# Altium PCB 00.Main.PcbDoc (part 1 of 5)
Units mm, origin at the board's own origin, x right, y up, seen from the top; angles counter-clockwise.
Board outline 300 x 165 mm, 2 copper layers (Top Layer, Bottom Layer); 76 components, 103 nets, 576 pads, 97 vias.
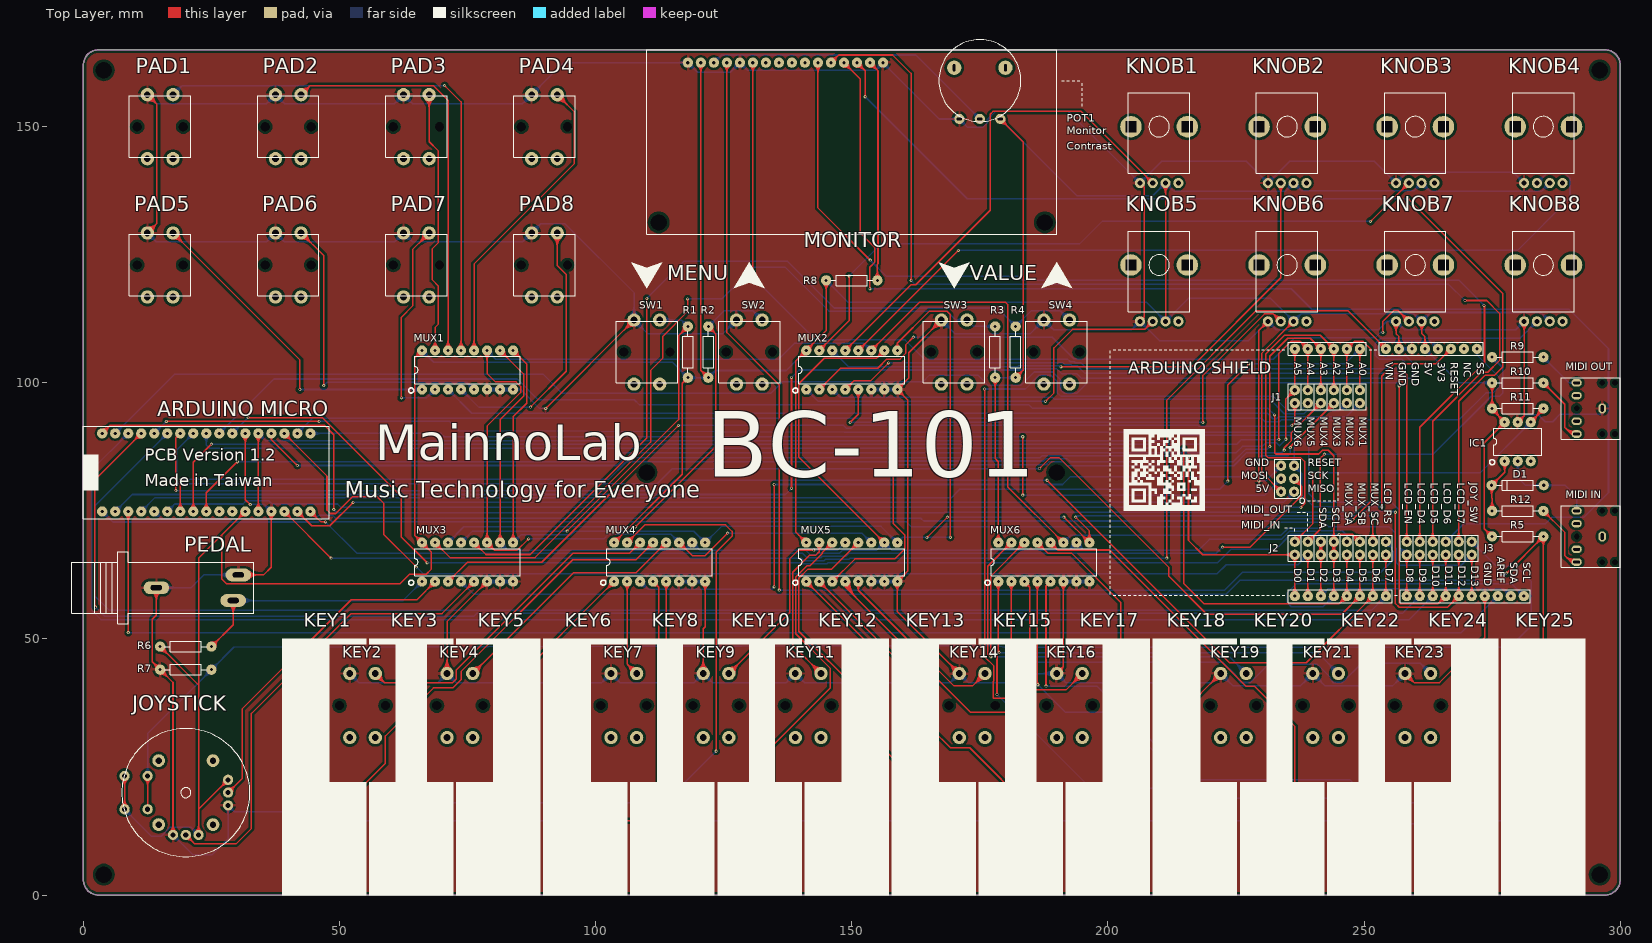
[diagram p0: Top Layer view]
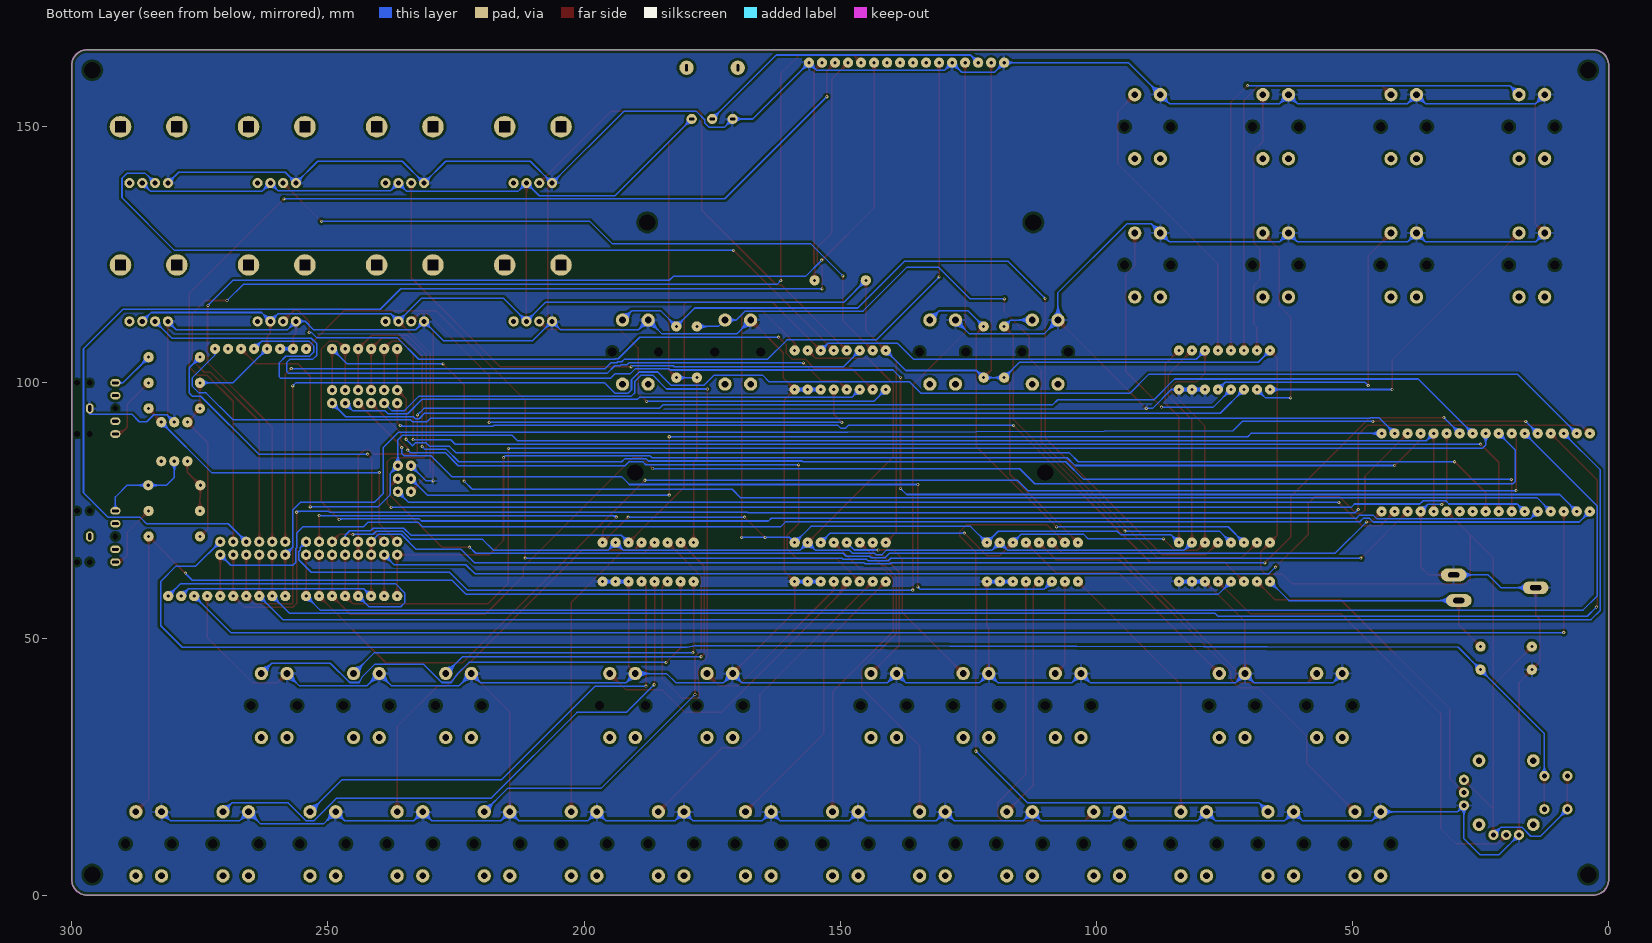
[diagram p1: Bottom Layer view, seen from below]

## Layer stack, top to bottom
Top Layer: signal copper 0.0356
Dielectric: dielectric 0.32, FR-4, Dk 4.8
Bottom Layer: signal copper 0.0356

## Board outline
0,3 0,162 cw(c3,162) 3,165 297,165 cw(c297,162) 300,162 300,3 cw(c297,3) 297,0 3,0 cw(c3,3)

## Design rules (kind name [scope] priority, off if disabled: settings)
Clearance [All] p1: gap=0.3
ComponentClearance [All] p1 off: gap=0.254 collisioncheckmode=3 verticalgap=0.254 showdistances=FALSE
HoleSize [All] p1: absolutevalues=TRUE maxlimit=30 minlimit=0.3 maxpercent=80.000 minpercent=20.000
PolygonConnect [All] p1: connectstyle=Relief reliefconductorwidth=0.5 reliefentries=4 polygonreliefangle="90 Angle" airgapwidth=0.5
RoutingVias [All] p1: holewidth=0.3 width=0.6 viastyle="Through Hole" minholewidth=0.3 minwidth=0.6 maxholewidth=0.3 maxwidth=0.6
SilkToSilkClearance [All] p1: silktosilkclearance=0
SilkToSolderMaskClearance [IsPad] p1: minsilkscreentomaskgap=0 clearancetoexposedcopper=TRUE
SolderMaskExpansion [All] p1: expansion=0.102
Width [All] p1: maxlimit=0.3 minlimit=0.3 preferedwidth=0.3 minimp=50.000000 maximp=50.000000 favimp=50.000000
24 further rules are at their usual default settings.

## Classes and differential pairs
component class "02.Pads and Knobs": KNOB1 KNOB2 KNOB3 KNOB4 KNOB5 KNOB6 KNOB7 KNOB8 "KNOB 1" MUX1 MUX2 PAD1 PAD2 PAD3 PAD4 PAD5 PAD6 PAD7 PAD8
component class 03.Keys: KEY1 KEY2 KEY3 KEY4 KEY5 KEY6 KEY7 KEY8 KEY9 KEY10 KEY11 KEY12 KEY13 KEY14 KEY15 KEY16 KEY17 KEY18 KEY19 KEY20 KEY21 KEY22 KEY23 KEY24 MUX4 MUX5 MUX6
component class "01.Arduino and Interfaces": "ARDUINO MICRO" "ARDUINO SHIELD" Contrast D1 IC1 J1 J2 J3 JOYSTICK KEY25 "MIDI IN" "MIDI OUT" MONITOR MUX3 PEDAL R1 R2 R3 R4 R5 R6 R7 R8 R9 R10 R11 R12 SW1 SW2 SW3 SW4

## Components (designator, comment, footprint, x,y, rotation, side; value= is the part's Value field where it differs from the comment)
"ARDUINO MICRO" "Arduino Micro" "ARDUINO MICRO" 24,82.5 r0 top locked
"ARDUINO SHIELD" "Arduino Shield" "ARDUINO SHIELD" 257.5,82.5 r180 top locked
D1 "1N4148" DIODE 280,80 r180 top
IC1 "PC900" DIP-6 280,88.5 r90 top (schematic designator IC7)
J1 "Connector 2X6" A2541WV0-2X6P 242.838,97.3 r0 top locked
J2 "Connector 2X8" A2541WV0-2X8P 245.378,67.7 r0 top locked (schematic designator J9)
J3 "Connector 2X6" A2541WV0-2X6P 264.682,67.7 r0 top locked (schematic designator J8)
JOYSTICK "FJM10K-S1B10K" "JOYSTICK FJM10K-S1B10K" 20,20 r270 top locked
KEY1 "HTS-2201T" "ALPS-SKHC-12MM - NO SILK" 47,10 r90 top locked
KEY2 "HTS-2201T" "ALPS-SKHC-12MM - NO SILK" 54.5,37 r90 top locked
KEY3 "HTS-2201T" "ALPS-SKHC-12MM - NO SILK" 64,10 r90 top locked
KEY4 "HTS-2201T" "ALPS-SKHC-12MM - NO SILK" 73.5,37 r90 top locked
KEY5 "HTS-2201T" "ALPS-SKHC-12MM - NO SILK" 81,10 r90 top locked
KEY6 "HTS-2201T" "ALPS-SKHC-12MM - NO SILK" 98,10 r90 top locked
KEY7 "HTS-2201T" "ALPS-SKHC-12MM - NO SILK" 105.5,37 r90 top locked
KEY8 "HTS-2201T" "ALPS-SKHC-12MM - NO SILK" 115,10 r90 top locked
KEY9 "HTS-2201T" "ALPS-SKHC-12MM - NO SILK" 123.5,37 r90 top locked
KEY10 "HTS-2201T" "ALPS-SKHC-12MM - NO SILK" 132,10 r90 top locked
KEY11 "HTS-2201T" "ALPS-SKHC-12MM - NO SILK" 141.5,37 r90 top locked
KEY12 "HTS-2201T" "ALPS-SKHC-12MM - NO SILK" 149,10 r90 top locked
KEY13 "HTS-2201T" "ALPS-SKHC-12MM - NO SILK" 166,10 r90 top locked
KEY14 "HTS-2201T" "ALPS-SKHC-12MM - NO SILK" 173.5,37 r90 top locked
KEY15 "HTS-2201T" "ALPS-SKHC-12MM - NO SILK" 183,10 r90 top locked
KEY16 "HTS-2201T" "ALPS-SKHC-12MM - NO SILK" 192.5,37 r90 top locked
KEY17 "HTS-2201T" "ALPS-SKHC-12MM - NO SILK" 200,10 r90 top locked
KEY18 "HTS-2201T" "ALPS-SKHC-12MM - NO SILK" 217,10 r90 top locked
KEY19 "HTS-2201T" "ALPS-SKHC-12MM - NO SILK" 224.5,37 r90 top locked
KEY20 "HTS-2201T" "ALPS-SKHC-12MM - NO SILK" 234,10 r90 top locked
KEY21 "HTS-2201T" "ALPS-SKHC-12MM - NO SILK" 242.5,37 r90 top locked
KEY22 "HTS-2201T" "ALPS-SKHC-12MM - NO SILK" 251,10 r90 top locked
KEY23 "HTS-2201T" "ALPS-SKHC-12MM - NO SILK" 260.5,37 r90 top locked
KEY24 "HTS-2201T" "ALPS-SKHC-12MM - NO SILK" 268,10 r90 top locked
KEY25 "HTS-2201T" "ALPS-SKHC-12MM - NO SILK" 285,10 r90 top locked
KNOB1 "VR Mono" RK11K113 210,150 r0 top
KNOB2 "VR Mono" RK11K113 235,150 r0 top
KNOB3 "VR Mono" RK11K113 260,150 r0 top
KNOB4 "VR Mono" RK11K113 285,150 r0 top
KNOB5 "VR Mono" RK11K113 210,123 r0 top
KNOB6 "VR Mono" RK11K113 235,123 r0 top
KNOB7 "VR Mono" RK11K113 260,123 r0 top
KNOB8 "VR Mono" RK11K113 285,123 r0 top
"MIDI IN" "Jack 3.5mm PhoneJack" "PHONEJACK EJ05-06-PF" 296.5,70 r180 top (schematic designator JK2)
"MIDI OUT" "Jack 3.5mm PhoneJack" "PHONEJACK EJ05-06-PF" 296.5,95 r180 top (schematic designator JK1)
MONITOR "Module LCM1602" LCM1602 150,147 r0 top locked
MUX1 "HD74HC4051P" DIP-16 75,102.5 r90 top
MUX2 "HD74HC4051P" DIP-16 150,102.5 r90 top
MUX3 "HD74HC4051P" DIP-16 75,65 r90 top
MUX4 "HD74HC4051P" DIP-16 112.5,65 r90 top
MUX5 "HD74HC4051P" DIP-16 150,65 r90 top
MUX6 "HD74HC4051P" DIP-16 187.5,65 r90 top
PAD1 "HTS-2201T" ALPS-SKHC-12MM 15,150 r90 top
PAD2 "HTS-2201T" ALPS-SKHC-12MM 40,150 r90 top
PAD3 "HTS-2201T" ALPS-SKHC-12MM 65,150 r90 top
PAD4 "HTS-2201T" ALPS-SKHC-12MM 90,150 r90 top
PAD5 "HTS-2201T" ALPS-SKHC-12MM 15,123 r90 top
PAD6 "HTS-2201T" ALPS-SKHC-12MM 40,123 r90 top
PAD7 "HTS-2201T" ALPS-SKHC-12MM 65,123 r90 top
PAD8 "HTS-2201T" ALPS-SKHC-12MM 90,123 r90 top
PEDAL "HTJ-064-10I" HTJ-064-10I 6.75,60 r90 top locked (schematic designator JK2)
POT1 "B10K" RV100F-30 175,159 r0 top (schematic designator VR1)
R1 "10K" "RES 1/4W" 118,106 r90 top
R2 "10K" "RES 1/4W" 122,106 r90 top
R3 "10K" "RES 1/4W" 178,106 r90 top
R4 "10K" "RES 1/4W" 182,106 r90 top
R5 "10K" "RES 1/4W" 280,70 r0 top
R6 "10K" "RES 1/4W" 20,48.5 r0 top
R7 "10K" "RES 1/4W" 20,44 r180 top
R8 "220R" "RES 1/4W" 150,120 r0 top
R9 "220R" "RES 1/4W" 280,105 r180 top
R10 "220R" "RES 1/4W" 280,100 r180 top
R11 "220R" "RES 1/4W" 280,95 r180 top
R12 "220R" "RES 1/4W" 280,75 r180 top
SW1 "HTS-2201T" ALPS-SKHC-12MM 110,106 r90 top
SW2 "HTS-2201T" ALPS-SKHC-12MM 130,106 r90 top
SW3 "HTS-2201T" ALPS-SKHC-12MM 170,106 r90 top
SW4 "HTS-2201T" ALPS-SKHC-12MM 190,106 r90 top

## Footprints (in the part's own frame and the unit in brackets; to place one, negate y for a bottom-side part, rotate by r counter-clockwise, add the part's x,y. Pads: shape width x height; smd on the part's side, far side on the other; paste and mask are expansions set on the pad)
A2541WV0-2X6P [mm]
  round 2 hole 0.84: 1(-6.35,-1.27) 2(-6.35,1.27) 3(-3.81,-1.27) 4(-3.81,1.27) 5(-1.27,-1.27) 6(-1.27,1.27) 7(1.27,-1.27) 8(1.27,1.27) 9(3.81,-1.27) 10(3.81,1.27) 11(6.35,-1.27) 12(6.35,1.27)
  silkscreen extent -7.62,-2.54 7.62,2.54
A2541WV0-2X8P [mm]
  round 2 hole 0.84: 1(-8.89,-1.27) 2(-8.89,1.27) 3(-6.35,-1.27) 4(-6.35,1.27) 5(-3.81,-1.27) 6(-3.81,1.27) 7(-1.27,-1.27) 8(-1.27,1.27) 9(1.27,-1.27) 10(1.27,1.27) 11(3.81,-1.27) 12(3.81,1.27) 13(6.35,-1.27) 14(6.35,1.27) 15(8.89,-1.27) 16(8.89,1.27)
  silkscreen extent -10.16,-2.54 10.16,2.54
ALPS-SKHC-12MM [mm]
  round 2.6 hole 1.3: 1(6.25,2.5) 2(6.25,-2.5) ""(-6.25,-2.5) ""(-6.25,2.5)
  round 0 hole 1.8: ""(0,4.5) ""(0,-4.5)
  silkscreen extent -6,-6 6,6
"ALPS-SKHC-12MM - NO SILK" [mm]
  round 2.6 hole 1.3: 1(6.25,2.5) 2(6.25,-2.5) ""(-6.25,-2.5) ""(-6.25,2.5)
  round 0 hole 1.8: ""(0,4.5) ""(0,-4.5)
"ARDUINO MICRO" [mm]
  round 2 hole 0.65: 1(-20.32,-7.62) 2(-17.78,-7.62) 3(-15.24,-7.62) 4(-12.7,-7.62) 5(-10.16,-7.62) 6(-7.62,-7.62) 7(-5.08,-7.62) 8(-2.54,-7.62) 9(0,-7.62) 10(2.54,-7.62) 11(5.08,-7.62) 12(7.62,-7.62) 13(10.16,-7.62) 14(12.7,-7.62) 15(15.24,-7.62) 16(17.78,-7.62) 17(20.32,-7.62) 18(20.32,7.62) 19(17.78,7.62) 20(15.24,7.62) 21(12.7,7.62) 22(10.16,7.62) 23(7.62,7.62) 24(5.08,7.62) 25(2.54,7.62) 26(0,7.62) 27(-2.54,7.62) 28(-5.08,7.62) 29(-7.62,7.62) 30(-10.16,7.62) 31(-12.7,7.62) 32(-15.24,7.62) 33(-17.78,7.62) 34(-20.32,7.62)
  silkscreen extent -24,-9 24,9
"ARDUINO SHIELD" [mm]
  round 2 hole 0.65: 1(-14.548,-24.13) 2(-12.008,-24.13) 3(-9.468,-24.13) 4(-6.928,-24.13) 5(-4.388,-24.13) 6(-1.848,-24.13) 7(0.692,-24.13) 8(3.232,-24.13) 9(8.312,-24.13) 10(10.852,-24.13) 11(13.392,-24.13) 12(15.932,-24.13) 13(18.472,-24.13) 14(21.012,-24.13) 15(21.012,24.13) 16(18.472,24.13) 17(15.932,24.13) 18(13.392,24.13) 19(10.852,24.13) 20(8.312,24.13) 21(5.772,24.13) 22(3.232,24.13) 23(-0.832,24.13) 24(-3.372,24.13) 25(-5.912,24.13) 26(-8.452,24.13) 27(-10.992,24.13) 28(-13.532,24.13) 29(-16.072,24.13) 30(-18.612,24.13) 31(-21.152,24.13) 32(-23.692,24.13)
  round 2 hole 0.84: "1\""(21.152,3.76) "2\""(23.692,3.76) "3\""(21.152,1.22) "4\""(23.692,1.22) "5\""(21.152,-1.32) "6\""(23.692,-1.32)
  silkscreen extent -24.96,-25.4 24.96,25.4
DIODE [mm]
  round 2 hole 0.6: 1(-5.08,0) 2(5.08,0)
  silkscreen extent -4.06,-1.02 4.06,1.02
DIP-6 [mm]
  round 2 hole 0.6: 1(-3.81,2.54) 2(-3.81,0) 3(-3.81,-2.54) 4(3.81,-2.54) 5(3.81,0) 6(3.81,2.54)
  silkscreen extent -4.5,-4.7 2.65,5.5
DIP-16 [mm] "DIP; 16 Leads; Row Spacing 7.62 mm; Pitch 2.54 mm"
  round 2 hole 0.6: 1(-3.81,8.89) 2(-3.81,6.35) 3(-3.81,3.81) 4(-3.81,1.27) 5(-3.81,-1.27) 6(-3.81,-3.81) 7(-3.81,-6.35) 8(-3.81,-8.89) 9(3.81,-8.89) 10(3.81,-6.35) 11(3.81,-3.81) 12(3.81,-1.27) 13(3.81,1.27) 14(3.81,3.81) 15(3.81,6.35) 16(3.81,8.89)
  silkscreen extent -4.5,-10.3 2.65,11.5
HTJ-064-10I [mm]
  oval 2.5x5 hole 1 slot 2.2 at 90 deg: 1(0,-7.5) 2(-2.5,-22.5) 4(2.5,-23.5)
  silkscreen extent -7,-26.5 7,9
"JOYSTICK FJM10K-S1B10K" [mm]
  round 2.5 hole 1.25: 0(-6.25,5.3) 0(-6.25,-5.3) 0(6.25,5.3) 0(6.25,-5.3)
  round 2 hole 1: 1X(8.25,-2.5) 1Y(2.5,8.25) 2X(8.25,0) 2Y(0,8.25) 3X(8.25,2.5) 3Y(-2.5,8.25) 5(-3.25,-7.45) 5(3.25,-7.45) 6(-3.25,-11.95) 6(3.25,-11.95)
  silkscreen extent -12.5,-12.5 12.5,12.5
LCM1602 [mm]
  round 2 hole 0.65: 1(-32,15.5) 2(-29.46,15.5) 3(-26.92,15.5) 4(-24.38,15.5) 5(-21.84,15.5) 6(-19.3,15.5) 7(-16.76,15.5) 8(-14.22,15.5) 9(-11.68,15.5) 10(-9.14,15.5) 11(-6.6,15.5) 12(-4.06,15.5) 13(-1.52,15.5) 14(1.02,15.5) 15(3.56,15.5) 16(6.1,15.5)
  round 0 hole 3.2: G(-37.7,-15.7) G(37.7,-15.7)
  silkscreen extent -40,-18 40,18
"PHONEJACK EJ05-06-PF" [mm]
  round 0 hole 1.1: 0(-2.5,5) 0(-2.5,-5) 0(0,5) 0(0,-5) 0(5,0)
  oval 1.5x2 hole 0.5 slot 1.3 at 90 deg: 1(0,0)
  oval 2x1.5 hole 0.5 slot 1.3 at 0 deg: 2(5,5) 3(5,2.5) 4(5,-2.5) 5(5,-5)
  silkscreen extent -3.5,-6 8,6
"RES 1/4W" [mm]
  round 2 hole 0.6: 1(-5,0) 2(5,0)
  silkscreen extent -4.06,-1.02 4.06,1.02
RK11K113 [mm]
  round 4.2 hole 2.1 square: 0(-5.5,0) 0(5.5,0)
  round 2 hole 1: 0(3.75,-11) 1(-3.75,-11) 2(-1.25,-11) 3(1.25,-11)
  silkscreen extent -6,-9.1 6,6.6
RV100F-30 [mm]
  round 2.8 hole 0.5 slot 1.4 at 90 deg: 0(-5,2.5) 0(5,2.5)
  round 2 hole 0.5 slot 1 at 0 deg: 1(-4,-7.5) 2(0,-7.5) 3(4,-7.5)
  silkscreen extent -8,-8 8,8

## Part data
"ARDUINO MICRO": "Arduino Micro Board"
D1: library part "Diode 1N4148"
IC1: library part "Optoisolator PC900", "Sharp PC900 Optoisolator"
JOYSTICK: library part "Joystick with Sw"
KEY1 KEY2 KEY3 KEY4 KEY5 KEY6 KEY7 KEY8 KEY9 KEY10 KEY11 KEY12 KEY13 KEY14 KEY15 KEY16 KEY17 KEY18 KEY19 KEY20 KEY21 KEY22 KEY23 KEY24 KEY25 PAD1 PAD2 PAD3 PAD4 PAD5 PAD6 PAD7 PAD8 SW1 SW2 SW3 SW4: library part "Tact Switch HTS-2201T"
MUX1 MUX2 MUX3 MUX4 MUX5 MUX6: library part TC74HC4051AF
POT1: library part "VR Mono"
R1 R2 R3 R4 R5 R6 R7 R8 R9 R10 R11 R12: library part Resistor

## Free pads (board coordinates)
  round 0 hole 3.2: 0(4,161) 1(4,4) 2(296,161) 3(296,4) 4(190,82.5) 5(110,82.5)

## Via types
v1: diameter 0.6, hole 0.3, Top Layer to Bottom Layer, 97 vias

## Nets (pads, with @x,y where several pads share a name; then routed paths per layer and width w, separated by ;. In a path a pad name is that pad's centre, name@x,y a point inside that pad or via, vN(x,y) a via of type N, cw(c..) or ccw(c..) an arc to the next point about the centre after c; other vN are vias at no path point)
3V3: "ARDUINO MICRO.2" "ARDUINO SHIELD.4" | length 315.4
  Top Layer w0.3: v1@138.132,79.492 ccw(c137.876,79.749) 138.238,79.749 ccw(c138.6,79.749) v1@138.344,79.492 ; v1@138.132,100.947 cw(c137.876,100.69) 138.238,100.69 cw(c138.6,100.69) v1@138.344,100.947 ; v1(138.238,79.386) v1(138.238,101.053)
  Bottom Layer w0.3: 6.22,74.88 9.533,78.193 137.044,78.193 v1(138.238,79.386) ; 6.22,75.43 ccw(c6.22,76.758) 7.159,75.819 ccw(c8.098,74.88) 6.77,74.88 ; 6.22,75.73 ccw(c6.22,77.782) 7.671,76.331 ccw(c9.122,74.88) 7.07,74.88 ; v1@138.088,79.386 cw(c137.726,79.386) 137.982,79.13 cw(c138.238,78.874) v1@138.238,79.236 ; v1(138.238,101.053) 139.686,102.5 183.176,102.5 183.386,102.71 190.06,102.71 191.045,101.725 194.03,101.725 194.854,100.9 259.247,100.9 259.552,101.205 259.552,103.876 258.261,105.167 253.63,105.167 252.817,105.98 252.817,107.276 253.63,108.088 262.97,108.088 264.428,106.63 ; v1@138.238,101.203 ccw(c138.238,101.565) 138.494,101.309 ccw(c138.75,101.053) v1@138.388,101.053 ; 263.578,106.63 ccw(c261.526,106.63) 262.977,108.081 ccw(c264.428,109.532) 264.428,107.48 ; 263.878,106.63 ccw(c262.55,106.63) 263.489,107.569 ccw(c264.428,108.508) 264.428,107.18
5V: "ARDUINO MICRO.12" "ARDUINO SHIELD.2\"" "ARDUINO SHIELD.5" IC1.6 JOYSTICK.3X JOYSTICK.3Y JOYSTICK.6 KNOB1.3 KNOB2.3 KNOB3.3 KNOB4.3 KNOB5.3 KNOB6.3 KNOB7.3 KNOB8.3 MONITOR.2 MUX1.16 MUX2.16 MUX3.16 MUX4.16 MUX5.16 MUX6.16 POT1.3 R1.1 R2.1 R3.1 R4.1 R5.1 R6.1 R8.1 R10.2 R11.2 | length 1227.7
  Top Layer w0.3: JOYSTICK.6@7.449,17.351 ccw(c5.998,18.802) 8.05,18.802 ccw(c10.102,18.802) JOYSTICK.6@8.651,17.351 ; JOYSTICK.6@7.449,22.649 cw(c5.998,21.198) 8.05,21.198 cw(c10.102,21.198) JOYSTICK.6@8.651,22.649 ; JOYSTICK.6@7.661,17.139 ccw(c6.722,18.078) 8.05,18.078 ccw(c9.378,18.078) JOYSTICK.6@8.439,17.139 ; JOYSTICK.6@7.661,22.861 cw(c6.722,21.922) 8.05,21.922 cw(c9.378,21.922) JOYSTICK.6@8.439,22.861 ; JOYSTICK.6@8.05,16.75 JOYSTICK.6@8.05,23.25 ; R6.1@15,47.65 cw(c15,45.598) 16.451,47.049 cw(c17.902,48.5) R6.1@15.85,48.5 ; R6.1@15,47.95 cw(c15,46.622) 15.939,47.561 cw(c16.878,48.5) R6.1@15.55,48.5 ; R6.1@15,48.5 22.5,41 ; JOYSTICK.3X@21.899,12.351 ccw(c20.448,13.802) 22.5,13.802 ccw(c24.552,13.802) JOYSTICK.3X@23.101,12.351 ; JOYSTICK.3X@22.111,12.139 ccw(c21.172,13.078) 22.5,13.078 ccw(c23.828,13.078) JOYSTICK.3X@22.889,12.139 ; JOYSTICK.3X@22.5,11.75 22.5,16.75 ; JOYSTICK.3Y@27.4,22.5 cw(c25.348,22.5) 26.799,21.049 cw(c28.25,19.598) JOYSTICK.3Y@28.25,21.65 ; JOYSTICK.3Y@27.7,22.5 cw(c26.372,22.5) 27.311,21.561 cw(c28.25,20.622) JOYSTICK.3Y@28.25,21.95 ; JOYSTICK.3Y@28.25,22.5 22.5,16.75 ; 30.77,74.88 cw(c28.718,74.88) 30.169,73.429 cw(c31.62,71.978) 31.62,74.03 ; 31.07,74.88 cw(c29.742,74.88) 30.681,73.941 cw(c31.62,73.002) 31.62,74.33 ; 31.62,74.88 27.037,70.297 ; MUX3.16@65.26,68.81 ccw(c63.208,68.81) 64.659,70.261 ccw(c66.11,71.712) MUX3.16@66.11,69.66 ; MUX1.16@65.26,106.31 cw(c63.208,106.31) 64.659,104.859 cw(c66.11,103.408) MUX1.16@66.11,105.46 ; MUX3.16@65.56,68.81 ccw(c64.232,68.81) 65.171,69.749 ccw(c66.11,70.688) MUX3.16@66.11,69.36 ; MUX1.16@65.56,106.31 cw(c64.232,106.31) 65.171,105.371 cw(c66.11,104.432) MUX1.16@66.11,105.76 ; MUX3.16@66.11,67.96 cw(c66.11,65.908) 67.561,67.359 cw(c69.012,68.81) MUX3.16@66.96,68.81 ; MUX3.16@66.11,68.26 cw(c66.11,66.932) 67.049,67.871 cw(c67.988,68.81) MUX3.16@66.66,68.81 ; MUX1.16@66.11,106.31 64.654,104.854 64.654,70.266 MUX3.16@66.11,68.81 67.88,67.04 67.88,63.58 66.94,62.64 63.663,62.64 61.817,60.794 27.951,60.794 27.037,61.708 27.037,70.297 ; MUX4.16@103.61,68.81 116.927,82.127 116.927,99.927 ; MUX4.16@103.61,69.36 ccw(c103.61,70.688) 104.549,69.749 ccw(c105.488,68.81) MUX4.16@104.16,68.81 ; MUX4.16@103.61,69.66 ccw(c103.61,71.712) 105.061,70.261 ccw(c106.512,68.81) MUX4.16@104.46,68.81 ; R1.1@117.174,100.801 cw(c116.27,100.584) 116.927,99.927 ; R1.1@117.801,100.174 ccw(c117.584,99.27) 116.927,99.927 ; R1.1@118,101 116.927,99.927 ; MONITOR.2@119.939,161.899 cw(c118.488,160.448) 120.54,160.448 cw(c122.592,160.448) MONITOR.2@121.141,161.899 ; MONITOR.2@120.151,162.111 cw(c119.212,161.172) 120.54,161.172 cw(c121.868,161.172) MONITOR.2@120.929,162.111 ; MONITOR.2@120.54,162.5 120.54,102.46 R2.1@122,101 ; R2.1@121.15,101 ccw(c119.098,101) 120.549,102.451 ccw(c122,103.902) R2.1@122,101.85 ; R2.1@121.45,101 ccw(c120.122,101) 121.061,101.939 ccw(c122,102.878) R2.1@122,101.55 ; MUX5.16@140.26,68.81 ccw(c138.208,68.81) 139.659,70.261 ccw(c141.11,71.712) MUX5.16@141.11,69.66 ; MUX2.16@140.26,106.31 cw(c138.208,106.31) 139.659,104.859 cw(c141.11,103.408) MUX2.16@141.11,105.46 ; MUX5.16@140.56,68.81 ccw(c139.232,68.81) 140.171,69.749 ccw(c141.11,70.688) MUX5.16@141.11,69.36 ; MUX2.16@140.56,106.31 cw(c139.232,106.31) 140.171,105.371 cw(c141.11,104.432) MUX2.16@141.11,105.76 ; MUX5.16@141.11,68.81 139.06,70.86 139.06,104.26 MUX2.16@141.11,106.31 145,110.2 R8.1@145,120 ; MUX2.16@141.11,106.86 ccw(c141.11,108.188) 142.049,107.249 ccw(c142.988,106.31) MUX2.16@141.66,106.31 ; MUX2.16@141.11,107.16 ccw(c141.11,109.212) 142.561,107.761 ccw(c144.012,106.31) MUX2.16@141.96,106.31 ; R8.1@144.399,119.399 cw(c142.948,117.948) 145,117.948 cw(c147.052,117.948) R8.1@145.601,119.399 ; R8.1@144.611,119.611 cw(c143.672,118.672) 145,118.672 cw(c146.328,118.672) R8.1@145.389,119.611 ; R3.1@177.399,100.399 cw(c175.948,98.948) 178,98.948 cw(c180.052,98.948) R3.1@178.601,100.399 ; R3.1@177.611,100.611 cw(c176.672,99.672) 178,99.672 cw(c179.328,99.672) R3.1@178.389,100.611 ; R3.1@178,101 178,85.203 178.61,84.593 MUX6.16@178.61,68.81 ; MUX6.16@178.009,69.411 ccw(c176.558,70.862) 178.61,70.862 ccw(c180.662,70.862) MUX6.16@179.211,69.411 ; MUX6.16@178.221,69.199 ccw(c177.282,70.138) 178.61,70.138 ccw(c179.938,70.138) MUX6.16@178.999,69.199 ; POT1.3@179,150.65 cw(c179,148.598) 180.451,150.049 cw(c181.902,151.5) POT1.3@179.85,151.5 ; POT1.3@179,150.95 cw(c179,149.622) 179.939,150.561 cw(c180.878,151.5) POT1.3@179.55,151.5 ; POT1.3@179,151.5 183.475,147.025 183.475,102.475 R4.1@182,101 ; R4.1@182,101.55 ccw(c182,102.878) 182.939,101.939 ccw(c183.878,101) R4.1@182.55,101 ; R4.1@182,101.85 ccw(c182,103.902) 183.451,102.451 ccw(c184.902,101) R4.1@182.85,101 ; KNOB1.3@210.649,138.399 cw(c209.198,136.948) 211.25,136.948 cw(c213.302,136.948) KNOB1.3@211.851,138.399 ; KNOB1.3@210.861,138.611 cw(c209.922,137.672) 211.25,137.672 cw(c212.578,137.672) KNOB1.3@211.639,138.611 ; KNOB5.3@211.25,112 KNOB1.3@211.25,139 ; 232.958,78.74 ccw(c230.906,78.74) 232.357,80.191 ccw(c233.808,81.642) 233.808,79.59 ; 233.258,78.74 ccw(c231.93,78.74) 232.869,79.679 ccw(c233.808,80.618) 233.808,79.29 ; 233.808,78.74 230.065,82.483 230.065,105.815 KNOB6.3@236.25,112 ; KNOB6.3@235.4,112 cw(c233.348,112) 234.799,110.549 cw(c236.25,109.098) KNOB6.3@236.25,111.15 ; KNOB6.3@235.7,112 cw(c234.372,112) 235.311,111.061 cw(c236.25,110.122) KNOB6.3@236.25,111.45 ; KNOB7.3@260.649,111.399 cw(c259.198,109.948) 261.25,109.948 cw(c263.302,109.948) KNOB7.3@261.851,111.399 ; KNOB7.3@260.861,111.611 cw(c259.922,110.672) 261.25,110.672 cw(c262.578,110.672) KNOB7.3@261.639,111.611 ; KNOB7.3@261.25,112 261.25,109.615 261.888,108.977 261.888,106.63 ; 261.287,107.231 ccw(c259.836,108.682) 261.888,108.682 ccw(c263.94,108.682) 262.489,107.231 ; 261.499,107.019 ccw(c260.56,107.958) 261.888,107.958 ccw(c263.216,107.958) 262.277,107.019 ; R5.1@274.15,70 ccw(c272.098,70) 273.549,71.451 ccw(c275,72.902) R5.1@275,70.85 ; R11.2@274.399,95.601 ccw(c272.948,97.052) 275,97.052 ccw(c277.052,97.052) R11.2@275.601,95.601 ; R10.2@274.399,99.399 cw(c272.948,97.948) 275,97.948 cw(c277.052,97.948) R10.2@275.601,99.399 ; R5.1@274.45,70 ccw(c273.122,70) 274.061,70.939 ccw(c275,71.878) R5.1@275,70.55 ; R11.2@274.611,95.389 ccw(c273.672,96.328) 275,96.328 ccw(c276.328,96.328) R11.2@275.389,95.389 ; R10.2@274.611,99.611 cw(c273.672,98.672) 275,98.672 cw(c276.328,98.672) R10.2@275.389,99.611 ; R5.1@275,70 273.467,71.533 273.467,88.317 IC1.6@277.46,92.31 275,94.77 R11.2@275,95 R10.2@275,100 ; R11.2@275,94.15 cw(c275,92.653) 276.059,93.712 ; R11.2@275.25,95 ccw(c276.409,95) 275.589,94.181 ; R11.2@275.55,95 ccw(c277.433,95) 276.101,93.669 ; R11.2@275.85,95 ccw(c278.457,95) 276.614,93.156 ; 276.521,91.371 ccw(c275.582,92.31) 276.91,92.31 ccw(c275.582,92.31) 276.521,93.249 ; 276.521,91.371 cw(c277.46,90.432) IC1.6@277.46,91.76 ; 276.521,93.249 ccw(c277.46,94.188) IC1.6@277.46,92.86 ; IC1.6@277.46,91.46 ccw(c277.46,89.408) 276.009,90.859 ccw(c274.558,92.31) 276.61,92.31 ccw(c274.558,92.31) 276.009,93.761 ccw(c277.46,95.212) IC1.6@277.46,93.16 ; 22.5,16.75 22.5,41 ; 22.5,41 22.5,65.76 27.037,70.297
  Bottom Layer w0.3: JOYSTICK.6@8.05,15.9 cw(c8.05,13.848) 9.501,15.299 cw(c10.952,16.75) JOYSTICK.6@8.9,16.75 ; JOYSTICK.6@8.05,16.2 cw(c8.05,14.872) 8.989,15.811 cw(c9.928,16.75) JOYSTICK.6@8.6,16.75 ; JOYSTICK.6@8.05,16.75 13.308,11.492 15.192,11.492 16.919,13.219 21.031,13.219 JOYSTICK.3X@22.5,11.75 ; JOYSTICK.3X@21.65,11.75 ccw(c19.598,11.75) 21.049,13.201 ccw(c22.5,14.652) JOYSTICK.3X@22.5,12.6 ; JOYSTICK.3X@21.95,11.75 ccw(c20.622,11.75) 21.561,12.689 ccw(c22.5,13.628) JOYSTICK.3X@22.5,12.3 ; MUX1.16@66.11,105.46 cw(c66.11,103.408) 67.561,104.859 cw(c69.012,106.31) MUX1.16@66.96,106.31 ; MUX1.16@66.11,105.76 cw(c66.11,104.432) 67.049,105.371 cw(c67.988,106.31) MUX1.16@66.66,106.31 ; MUX1.16@66.11,106.31 68.421,103.999 115.001,103.999 R1.1@118,101 R2.1@122,101 123.399,102.399 ; R1.1@117.15,101 ccw(c115.098,101) 116.549,102.451 ccw(c118,103.902) R1.1@118,101.85 ; R1.1@117.45,101 ccw(c116.122,101) 117.061,101.939 ccw(c118,102.878) R1.1@118,101.55 ; R1.1@118.389,100.611 cw(c119.328,99.672) 119.328,101 cw(c119.328,102.328) R1.1@118.389,101.389 ; R1.1@118.601,100.399 cw(c120.052,98.948) 120.052,101 cw(c120.052,103.052) R1.1@118.601,101.601 ; R2.1@121.399,100.399 ccw(c119.948,98.948) 119.948,101 ccw(c119.948,103.052) R2.1@121.399,101.601 ; R2.1@121.611,100.611 ccw(c120.672,99.672) 120.672,101 ccw(c120.672,102.328) R2.1@121.611,101.389 ; R2.1@122.014,101.55 ccw(c122.046,102.764) 122.905,101.905 ccw(c123.764,101.046) R2.1@122.55,101.014 ; R2.1@122.022,101.85 ccw(c122.072,103.726) 123.399,102.399 ; R2.1@122.85,101.022 cw(c124.726,101.072) 123.399,102.399 ; MUX2.16@140.26,106.31 cw(c138.208,106.31) 139.659,104.859 cw(c141.11,103.408) MUX2.16@141.11,105.46 ; MUX2.16@140.56,106.31 cw(c139.232,106.31) 140.171,105.371 cw(c141.11,104.432) MUX2.16@141.11,105.76 ; MUX2.16@141.11,106.31 137.199,102.399 123.399,102.399 ; R8.1@145,119.15 cw(c145,117.098) 146.451,118.549 cw(c147.902,120) R8.1@145.85,120 ; R8.1@145,119.45 cw(c145,118.122) 145.939,119.061 cw(c146.878,120) R8.1@145.55,120 ; R8.1@145,120 149.266,115.734 207.516,115.734 KNOB5.3@211.25,112 215.797,116.547 231.703,116.547 KNOB6.3@236.25,112 237.723,113.473 259.777,113.473 KNOB7.3@261.25,112 262.977,113.727 284.523,113.727 KNOB8.3@286.25,112 ; R3.1@178,101 R4.1@182,101 ; POT1.3@179,150.65 cw(c179,148.598) 180.451,150.049 cw(c181.902,151.5) POT1.3@179.85,151.5 ; POT1.3@179,150.95 cw(c179,149.622) 179.939,150.561 cw(c180.878,151.5) POT1.3@179.55,151.5 ; POT1.3@179,151.5 193.983,136.517 208.767,136.517 KNOB1.3@211.25,139 212.901,137.349 234.599,137.349 KNOB2.3@236.25,139 237.723,137.527 259.777,137.527 KNOB3.3@261.25,139 262.901,137.349 284.599,137.349 KNOB4.3@286.25,139 ; R4.1@181.399,100.399 ccw(c179.948,98.948) 179.948,101 ccw(c179.948,103.052) R4.1@181.399,101.601 ; R4.1@181.611,100.611 ccw(c180.672,99.672) 180.672,101 ccw(c180.672,102.328) R4.1@181.611,101.389 ; KNOB5.3@210.4,112 ccw(c208.348,112) 209.799,113.451 ccw(c211.25,114.902) 211.25,112.85 ccw(c211.25,114.902) 212.701,113.451 ccw(c214.152,112) KNOB5.3@212.1,112 ; KNOB1.3@210.4,139 cw(c208.348,139) 209.799,137.549 cw(c211.25,136.098) 211.25,138.15 cw(c211.25,136.098) 212.701,137.549 cw(c214.152,139) KNOB1.3@212.1,139 ; KNOB5.3@210.7,112 ccw(c209.372,112) 210.311,112.939 ccw(c211.25,113.878) 211.25,112.55 ccw(c211.25,113.878) 212.189,112.939 ccw(c213.128,112) KNOB5.3@211.8,112 ; KNOB1.3@210.7,139 cw(c209.372,139) 210.311,138.061 cw(c211.25,137.122) 211.25,138.45 cw(c211.25,137.122) 212.189,138.061 cw(c213.128,139) KNOB1.3@211.8,139 ; KNOB6.3@235.4,112 ccw(c233.348,112) 234.799,113.451 ccw(c236.25,114.902) 236.25,112.85 ccw(c236.25,114.902) 237.701,113.451 ccw(c239.152,112) KNOB6.3@237.1,112 ; KNOB2.3@235.4,139 cw(c233.348,139) 234.799,137.549 cw(c236.25,136.098) 236.25,138.15 cw(c236.25,136.098) 237.701,137.549 cw(c239.152,139) KNOB2.3@237.1,139 ; KNOB6.3@235.7,112 ccw(c234.372,112) 235.311,112.939 ccw(c236.25,113.878) 236.25,112.55 ccw(c236.25,113.878) 237.189,112.939 ccw(c238.128,112) KNOB6.3@236.8,112 ; KNOB2.3@235.7,139 cw(c234.372,139) 235.311,138.061 cw(c236.25,137.122) 236.25,138.45 cw(c236.25,137.122) 237.189,138.061 cw(c238.128,139) KNOB2.3@236.8,139 ; KNOB7.3@260.4,112 ccw(c258.348,112) 259.799,113.451 ccw(c261.25,114.902) 261.25,112.85 ccw(c261.25,114.902) 262.701,113.451 ccw(c264.152,112) KNOB7.3@262.1,112 ; KNOB3.3@260.4,139 cw(c258.348,139) 259.799,137.549 cw(c261.25,136.098) 261.25,138.15 cw(c261.25,136.098) 262.701,137.549 cw(c264.152,139) KNOB3.3@262.1,139 ; KNOB7.3@260.7,112 ccw(c259.372,112) 260.311,112.939 ccw(c261.25,113.878) 261.25,112.55 ccw(c261.25,113.878) 262.189,112.939 ccw(c263.128,112) KNOB7.3@261.8,112 ; KNOB3.3@260.7,139 cw(c259.372,139) 260.311,138.061 cw(c261.25,137.122) 261.25,138.45 cw(c261.25,137.122) 262.189,138.061 cw(c263.128,139) KNOB3.3@261.8,139 ; 261.888,105.78 cw(c261.888,103.728) 263.339,105.179 cw(c264.79,106.63) 262.738,106.63 ; 261.888,106.08 cw(c261.888,104.752) 262.827,105.691 cw(c263.766,106.63) 262.438,106.63 ; 261.888,106.63 268.518,100 R10.2@275,100 ; R10.2@274.399,99.399 ccw(c272.948,97.948) 272.948,100 ccw(c272.948,102.052) R10.2@274.399,100.601 ; R10.2@274.611,99.611 ccw(c273.672,98.672) 273.672,100 ccw(c273.672,101.328) R10.2@274.611,100.389 ; KNOB8.3@285.4,112 ccw(c283.348,112) 284.799,113.451 ccw(c286.25,114.902) KNOB8.3@286.25,112.85 ; KNOB4.3@285.4,139 cw(c283.348,139) 284.799,137.549 cw(c286.25,136.098) KNOB4.3@286.25,138.15 ; KNOB8.3@285.7,112 ccw(c284.372,112) 285.311,112.939 ccw(c286.25,113.878) KNOB8.3@286.25,112.55 ; KNOB4.3@285.7,139 cw(c284.372,139) 285.311,138.061 cw(c286.25,137.122) KNOB4.3@286.25,138.45
A0: "ARDUINO MICRO.4" "ARDUINO SHIELD.9" J1.12 | length 288.3
  Top Layer w0.3: v1@223.323,80.915 ccw(c223.067,81.171) 223.429,81.171 ccw(c223.792,81.171) v1@223.535,80.915 ; v1(223.429,80.809) 223.429,99.605 v1(227.519,103.694) ; v1@227.369,103.694 cw(c227.007,103.694) 227.263,103.438 cw(c227.519,103.182) v1@227.519,103.544 ; 248.587,106.029 cw(c247.136,104.578) 249.188,104.578 cw(c251.24,104.578) 249.789,106.029 ; 248.799,106.241 cw(c247.86,105.302) 249.188,105.302 cw(c250.516,105.302) 249.577,106.241 ; J1.12@249.188,98.57 249.188,106.63
  Bottom Layer w0.3: 11.3,74.88 14.007,77.587 36.562,77.587 169.454,77.583 171.08,79.209 221.829,79.209 v1(223.429,80.809) ; 11.3,75.43 ccw(c11.3,76.758) 12.239,75.819 ccw(c13.178,74.88) 11.85,74.88 ; 11.3,75.73 ccw(c11.3,77.782) 12.751,76.331 ccw(c14.202,74.88) 12.15,74.88 ; v1@223.279,80.809 cw(c222.917,80.809) 223.173,80.553 cw(c223.429,80.297) v1@223.429,80.659 ; v1(227.519,103.694) 246.252,103.694 249.188,106.63 ; v1@227.625,103.588 cw(c227.881,103.332) 227.881,103.694 cw(c227.881,104.056) v1@227.625,103.8 ; 248.338,106.63 cw(c246.286,106.63) 247.737,105.179 cw(c249.188,103.728) 249.188,105.78 ; 248.638,106.63 cw(c247.31,106.63) 248.249,105.691 cw(c249.188,104.752) 249.188,106.08
A1: "ARDUINO MICRO.5" "ARDUINO SHIELD.10" J1.10 | length 301.3
  Top Layer w0.3: 246.047,106.029 cw(c244.596,104.578) 246.648,104.578 cw(c248.7,104.578) 247.249,106.029 ; 246.259,106.241 cw(c245.32,105.302) 246.648,105.302 cw(c247.976,105.302) 247.037,106.241 ; J1.10@246.648,98.57 246.648,106.63 248.106,108.088 249.82,108.088 251.268,106.641 251.268,76.77 v1(247.813,73.316) ; 246.648,107.18 ccw(c246.648,108.508) 247.587,107.569 ccw(c248.526,106.63) 247.198,106.63 ; 246.648,107.48 ccw(c246.648,109.532) 248.099,108.081 ccw(c249.55,106.63) 247.498,106.63 ; v1@247.813,73.466 ccw(c247.813,73.828) 248.069,73.572 ccw(c248.326,73.316) v1@247.963,73.316
  Bottom Layer w0.3: 13.84,74.03 cw(c13.842,71.982) 15.29,73.43 ; 13.84,74.33 cw(c13.841,73.005) 14.778,73.942 cw(c15.715,74.879) 14.39,74.88 ; 13.84,74.88 15.29,73.43 ; 14.69,74.88 ccw(c16.738,74.878) 15.29,73.43 ; 247.2,73.42 cw(c247.2,72.702) v1@247.707,73.21 ; v1(247.813,73.316) 247.709,73.42 232.144,73.42 231.75,73.026 164.029,73.026 163.485,73.57 49.246,73.57 48.633,74.183 45.989,74.183 45.236,73.43 15.29,73.43
A2: "ARDUINO MICRO.6" "ARDUINO SHIELD.11" J1.8 | length 306.2
  Top Layer w0.3: v1(237.671,75.678) 238.398,76.405 238.398,84.636 237.622,85.412 231.218,85.412 230.77,85.86 230.77,105.566 234.484,109.28 241.458,109.28 244.108,106.63 J1.8@244.108,98.57 ; v1@237.671,75.828 ccw(c237.671,76.19) 237.927,75.934 ccw(c238.183,75.678) v1@237.821,75.678 ; 243.258,106.63 ccw(c241.206,106.63) 242.657,108.081 ccw(c244.108,109.532) 244.108,107.48 ; J1.8@243.507,99.171 ccw(c242.056,100.622) 244.108,100.622 ccw(c246.16,100.622) J1.8@244.709,99.171 ; 243.507,106.029 cw(c242.056,104.578) 244.108,104.578 cw(c246.16,104.578) 244.709,106.029 ; 243.558,106.63 ccw(c242.23,106.63) 243.169,107.569 ccw(c244.108,108.508) 244.108,107.18 ; J1.8@243.719,98.959 ccw(c242.78,99.898) 244.108,99.898 ccw(c245.436,99.898) J1.8@244.497,98.959 ; 243.719,106.241 cw(c242.78,105.302) 244.108,105.302 cw(c245.436,105.302) 244.497,106.241
  Bottom Layer w0.3: 16.38,74.88 17.838,76.338 31.168,76.338 31.816,76.987 36.21,76.987 36.858,76.338 49.631,76.338 50.291,75.678 167.533,75.678 167.542,75.687 170.233,75.687 170.242,75.678 v1(237.671,75.678) ; 16.38,75.43 ccw(c16.38,76.758) 17.319,75.819 ccw(c18.258,74.88) 16.93,74.88 ; 16.38,75.73 ccw(c16.38,77.782) 17.831,76.331 ccw(c19.282,74.88) 17.23,74.88 ; v1@237.565,75.572 ccw(c237.309,75.316) 237.309,75.678 ccw(c237.309,76.04) v1@237.565,75.784
A3: "ARDUINO MICRO.7" "ARDUINO SHIELD.12" J1.6 | length 283.4
  Top Layer w0.3: 18.319,75.481 ccw(c16.868,76.932) 18.92,76.932 ccw(c20.972,76.932) 19.521,75.481 ; 18.531,75.269 ccw(c17.592,76.208) 18.92,76.208 ccw(c20.248,76.208) 19.309,75.269 ; 18.92,74.88 18.92,81.074 v1(18.985,81.139) ; 18.92,80.62 cw(c19.503,80.62) v1@19.091,81.033 ; v1@231.497,87.655 ccw(c231.241,87.912) 231.603,87.912 ccw(c231.965,87.912) v1@231.709,87.655 ; v1(231.603,87.549) 231.603,105.195 235.088,108.68 239.518,108.68 241.568,106.63 J1.6@241.568,98.57 ; 240.718,106.63 ccw(c238.666,106.63) 240.117,108.081 ccw(c241.568,109.532) 241.568,107.48 ; J1.6@240.967,99.171 ccw(c239.516,100.622) 241.568,100.622 ccw(c243.62,100.622) J1.6@242.169,99.171 ; 240.967,106.029 cw(c239.516,104.578) 241.568,104.578 cw(c243.62,104.578) 242.169,106.029 ; 241.018,106.63 ccw(c239.69,106.63) 240.629,107.569 ccw(c241.568,108.508) 241.568,107.18 ; J1.6@241.179,98.959 ccw(c240.24,99.898) 241.568,99.898 ccw(c242.896,99.898) J1.6@241.957,98.959 ; 241.179,106.241 cw(c240.24,105.302) 241.568,105.302 cw(c242.896,105.302) 241.957,106.241
  Bottom Layer w0.3: v1(18.985,81.139) 102.525,81.139 105.98,84.593 157.25,84.593 157.39,84.734 187.461,84.734 187.877,85.15 192.093,85.15 192.65,84.593 224.472,84.593 226.866,86.987 231.041,86.987 v1(231.603,87.549) ; v1@19.091,81.033 cw(c19.347,80.777) 19.347,81.139 cw(c19.347,81.501) v1@19.091,81.245 ; v1@231.453,87.549 cw(c231.091,87.549) 231.347,87.293 cw(c231.603,87.037) v1@231.603,87.399
A4: "ARDUINO MICRO.8" "ARDUINO SHIELD.13" J1.4 | length 273.7
  Top Layer w0.3: 20.859,75.481 ccw(c19.408,76.932) 21.46,76.932 ccw(c23.512,76.932) 22.061,75.481 ; 21.071,75.269 ccw(c20.132,76.208) 21.46,76.208 ccw(c22.788,76.208) 21.849,75.269 ; 21.46,74.88 21.46,84.503 v1(24.979,88.022) ; v1@24.829,88.022 cw(c24.467,88.022) 24.723,87.766 cw(c24.979,87.51) v1@24.979,87.872 ; v1@233.282,89.005 ccw(c233.025,89.262) 233.388,89.262 ccw(c233.75,89.262) v1@233.494,89.005 ; v1(233.388,88.899) 233.388,105.784 235.684,108.08 237.578,108.08 ; 238.178,106.63 ccw(c236.13,106.631) 237.578,108.08 ; 238.427,106.029 cw(c236.976,104.578) 239.028,104.578 cw(c241.08,104.578) 239.629,106.029 ; 238.478,106.63 ccw(c237.153,106.631) 238.09,107.568 ccw(c239.027,108.505) 239.028,107.18 ; 238.639,106.241 cw(c237.7,105.302) 239.028,105.302 cw(c240.356,105.302) 239.417,106.241 ; J1.4@239.028,98.57 239.028,106.63 237.578,108.08 ; 239.028,107.48 cw(c239.026,109.528) 237.578,108.08
  Bottom Layer w0.3: v1(24.979,88.022) 225.161,88.022 226.038,88.899 v1(233.388,88.899) ; v1@25.085,87.916 cw(c25.341,87.66) 25.341,88.022 cw(c25.341,88.385) v1@25.085,88.128 ; v1@233.282,88.793 ccw(c233.025,88.537) 233.025,88.899 ccw(c233.025,89.262) v1@233.282,89.005
A5: "ARDUINO MICRO.9" "ARDUINO SHIELD.14" J1.2 | length 255.6
  Top Layer w0.3: 23.399,75.481 ccw(c21.948,76.932) 24,76.932 ccw(c26.052,76.932) 24.601,75.481 ; 23.611,75.269 ccw(c22.672,76.208) 24,76.208 ccw(c25.328,76.208) 24.389,75.269 ; 24,74.88 24,78.534 v1(30.059,84.593) ; v1@29.909,84.593 cw(c29.547,84.593) 29.803,84.337 cw(c30.059,84.081) v1@30.059,84.443 ; v1@234.652,89.094 ccw(c234.396,89.35) 234.758,89.35 ccw(c235.12,89.35) v1@234.864,89.094 ; v1(234.758,88.988) 234.758,96.84 J1.2@236.488,98.57 236.488,106.63 ; J1.2@235.638,98.57 cw(c233.586,98.57) 235.037,97.119 cw(c236.488,95.668) J1.2@236.488,97.72 ; 235.887,106.029 cw(c234.436,104.578) 236.488,104.578 cw(c238.54,104.578) 237.089,106.029 ; J1.2@235.938,98.57 cw(c234.61,98.57) 235.549,97.631 cw(c236.488,96.692) J1.2@236.488,98.02 ; 236.099,106.241 cw(c235.16,105.302) 236.488,105.302 cw(c237.816,105.302) 236.877,106.241
  Bottom Layer w0.3: v1(30.059,84.593) 30.093,84.627 42.52,84.627 42.553,84.593 103.529,84.593 105.257,86.321 186.23,86.321 186.26,86.35 225.029,86.35 226.266,87.587 230.14,87.587 230.853,88.299 232.906,88.299 233.488,87.718 v1(234.758,88.988) ; v1@30.165,84.487 cw(c30.502,84.15) 30.502,84.627 ; v1@234.608,88.988 cw(c234.246,88.988) 234.502,88.732 cw(c234.758,88.475) v1@234.758,88.838
AREF: "ARDUINO MICRO.3" "ARDUINO SHIELD.30" | length 305.7
  Top Layer w0.3: 8.159,74.279 cw(c6.708,72.828) 8.76,72.828 cw(c10.812,72.828) 9.361,74.279 ; 8.371,74.491 cw(c7.432,73.552) 8.76,73.552 cw(c10.088,73.552) 9.149,74.491 ; v1@8.654,51.349 ccw(c8.398,51.605) 8.76,51.605 ccw(c9.122,51.605) v1@8.866,51.349 ; v1(8.76,51.243) 8.76,74.88
  Bottom Layer w0.3: v1(8.76,51.243) 268.985,51.243 276.112,58.37 ; v1@8.866,51.137 cw(c9.122,50.881) 9.122,51.243 cw(c9.122,51.605) v1@8.866,51.349 ; 275.262,58.37 cw(c273.21,58.37) 274.661,56.919 cw(c276.112,55.468) 276.112,57.52 ; 275.562,58.37 cw(c274.234,58.37) 275.173,57.431 cw(c276.112,56.492) 276.112,57.82
D0/RX: "ARDUINO MICRO.21" "ARDUINO SHIELD.15" J2.1 | length 248.6
  Top Layer w0.3: 36.421,89.317 cw(c36.286,88.925) 36.7,88.925 ; 36.7,90.12 36.7,88.925 ; 36.979,89.317 ccw(c37.114,88.925) 36.7,88.925 ; v1@41.619,83.857 ccw(c41.256,83.857) 41.513,84.113 ccw(c41.769,84.369) v1@41.769,84.007 ; v1(41.769,83.857) 36.7,88.925 ; v1@215.627,85.275 cw(c215.371,85.019) 215.733,85.019 cw(c216.095,85.019) v1@215.839,85.275 ; v1(215.733,85.381) 215.733,69.224 218.527,66.43 J2.1@236.488,66.43 236.488,58.37 ; 235.887,58.971 ccw(c234.436,60.422) 236.488,60.422 ccw(c238.54,60.422) 237.089,58.971 ; J2.1@235.887,67.031 cw(c234.436,68.482) 234.436,66.43 cw(c234.436,64.378) 235.887,65.829 cw(c234.436,64.378) 236.488,64.378 cw(c238.54,64.378) J2.1@237.089,65.829 ; 236.099,58.759 ccw(c235.16,59.698) 236.488,59.698 ccw(c237.816,59.698) 236.877,58.759 ; J2.1@236.099,66.819 cw(c235.16,67.758) 235.16,66.43 cw(c235.16,65.102) 236.099,66.041 cw(c235.16,65.102) 236.488,65.102 cw(c237.816,65.102) J2.1@236.877,66.041
  Bottom Layer w0.3: v1(41.769,83.857) 104.151,83.857 105.675,85.381 186.75,85.381 187.119,85.75 215.364,85.75 v1(215.733,85.381) ; v1@41.875,83.751 cw(c42.131,83.495) 42.131,83.857 cw(c42.131,84.219) v1@41.875,83.963 ; v1@215.583,85.381 ccw(c215.221,85.381) 215.477,85.637 ccw(c215.733,85.893) v1@215.733,85.531
D1/TX: "ARDUINO MICRO.20" "ARDUINO SHIELD.16" J2.3 | length 253.2
  Top Layer w0.3: 39.24,89.27 cw(c39.24,87.218) 40.691,88.669 cw(c42.142,90.12) 40.09,90.12 ; 39.24,89.57 cw(c39.24,88.242) 40.179,89.181 cw(c41.118,90.12) 39.79,90.12 ; 39.24,90.12 47.56,81.8 47.56,75.17 48.246,74.484 49.274,74.484 52.525,77.735 57.39,77.735 58.685,76.44 58.685,70.344 v1(65.01,64.019) ; v1@64.86,64.019 ccw(c64.497,64.019) 64.754,64.275 ccw(c65.01,64.532) v1@65.01,64.169 ; 238.427,58.971 ccw(c236.976,60.422) 239.028,60.422 ccw(c241.08,60.422) 239.629,58.971 ; J2.3@238.427,65.829 cw(c236.976,64.378) 239.028,64.378 cw(c241.08,64.378) J2.3@239.629,65.829 ; 238.639,58.759 ccw(c237.7,59.698) 239.028,59.698 ccw(c240.356,59.698) 239.417,58.759 ; J2.3@238.639,66.041 cw(c237.7,65.102) 239.028,65.102 cw(c240.356,65.102) J2.3@239.417,66.041 ; 239.028,58.37 J2.3@239.028,66.43
  Bottom Layer w0.3: v1@65.01,63.869 cw(c65.01,63.507) 65.266,63.763 cw(c65.522,64.019) v1@65.16,64.019 ; v1(65.01,64.019) 66.28,62.749 221.347,62.749 223.099,64.502 237.1,64.502 J2.3@239.028,66.43 ; J2.3@238.178,66.43 cw(c236.126,66.43) 237.577,64.979 cw(c239.028,63.528) J2.3@239.028,65.58 ; J2.3@238.478,66.43 cw(c237.15,66.43) 238.089,65.491 cw(c239.028,64.552) J2.3@239.028,65.88
D2/SDA: "ARDUINO MICRO.24" "ARDUINO SHIELD.17" "ARDUINO SHIELD.31" J2.5 J2.6 | length 324.3
  Top Layer w0.3: v1(32.177,93.217) 46.639,93.217 62.063,77.793 62.063,69.912 v1(67.118,64.858) ; v1@32.284,93.111 cw(c32.54,92.855) 32.54,93.217 cw(c32.54,93.58) v1@32.284,93.323 ; v1@66.968,64.858 ccw(c66.606,64.858) 66.862,65.114 ccw(c67.118,65.37) v1@67.118,65.008 ; 240.967,58.971 ccw(c239.516,60.422) 241.568,60.422 ccw(c243.62,60.422) 242.169,58.971 ; J2.5@240.967,65.829 cw(c239.516,64.378) 241.568,64.378 cw(c243.62,64.378) J2.5@242.169,65.829 ; J2.5@240.967,67.031 ccw(c239.516,68.482) 241.568,68.482 ccw(c243.62,68.482) J2.5@242.169,67.031 ; J2.6@240.967,68.369 cw(c239.516,66.918) 241.568,66.918 cw(c243.62,66.918) J2.6@242.169,68.369 ; J2.5@241.12,67.152 ccw(c240.844,67.597) 241.35,67.733 ccw(c242.032,67.915) J2.5@241.821,67.241 ; 241.179,58.759 ccw(c240.24,59.698) 241.568,59.698 ccw(c242.896,59.698) 241.957,58.759 ; J2.5@241.179,66.041 cw(c240.24,65.102) 241.568,65.102 cw(c242.896,65.102) J2.5@241.957,66.041 ; J2.5@241.179,66.819 ccw(c240.24,67.758) 241.568,67.758 ccw(c242.896,67.758) J2.5@241.957,66.819 ; J2.6@241.179,68.581 cw(c240.24,67.642) 241.568,67.642 cw(c242.896,67.642) J2.6@241.957,68.581 ; J2.5@241.315,67.241 ccw(c241.104,67.915) 241.786,67.733 ccw(c242.292,67.597) J2.5@242.016,67.152 ; 241.568,58.37 J2.5@241.568,66.43 J2.6@241.568,68.97
  Bottom Layer w0.3: 29.08,90.12 v1(32.177,93.217) ; 29.08,90.67 ccw(c29.08,91.998) 30.019,91.059 ccw(c30.958,90.12) 29.63,90.12 ; 29.08,90.97 ccw(c29.08,93.022) 30.531,91.571 ccw(c31.982,90.12) 29.93,90.12 ; v1@32.027,93.217 cw(c31.665,93.217) 31.921,92.961 cw(c32.177,92.705) v1@32.177,93.067 ; v1(67.118,64.858) 140.047,64.858 140.244,64.66 145.147,64.66 145.344,64.858 221.372,64.858 223.988,67.474 232.751,67.474 235.697,70.42 240.118,70.42 J2.6@241.568,68.97 ; v1@67.224,64.752 cw(c67.48,64.495) 67.48,64.858 cw(c67.48,65.22) v1@67.224,64.964 ; 241.568,58.37 243.026,59.828 277.194,59.828 278.652,58.37 ; 241.568,58.92 ccw(c241.568,60.248) 242.507,59.309 ccw(c243.446,58.37) 242.118,58.37 ; 241.568,59.22 ccw(c241.568,61.272) 243.019,59.821 ccw(c244.47,58.37) 242.418,58.37 ; 277.802,58.37 ccw(c275.75,58.37) 277.201,59.821 ccw(c278.652,61.272) 278.652,59.22 ; 278.102,58.37 ccw(c276.774,58.37) 277.713,59.309 ccw(c278.652,60.248) 278.652,58.92
D3/SCL: "ARDUINO MICRO.25" "ARDUINO SHIELD.18" "ARDUINO SHIELD.32" J2.7 J2.8 | length 367
  Top Layer w0.3: v1@232.442,93.631 cw(c232.186,93.375) 232.548,93.375 cw(c232.91,93.375) v1@232.654,93.631 ; v1(232.548,93.737) 232.548,86.295 232.739,86.104 241.153,86.104 241.882,86.834 243.026,86.834 244.108,85.752 J2.8@244.108,68.97 J2.7@244.108,66.43 244.108,58.37 ; 243.507,58.971 ccw(c242.056,60.422) 244.108,60.422 ccw(c246.16,60.422) 244.709,58.971 ; J2.7@243.507,65.829 cw(c242.056,64.378) 244.108,64.378 cw(c246.16,64.378) J2.7@244.709,65.829 ; J2.7@243.507,67.031 ccw(c242.056,68.482) 244.108,68.482 ccw(c246.16,68.482) J2.7@244.709,67.031 ; J2.8@243.507,68.369 cw(c242.056,66.918) 244.108,66.918 cw(c246.16,66.918) J2.8@244.709,68.369 ; J2.8@243.507,69.571 ccw(c242.056,71.022) 244.108,71.022 ccw(c246.16,71.022) J2.8@244.709,69.571 ; J2.7@243.66,67.152 ccw(c243.384,67.597) 243.89,67.733 ccw(c244.572,67.915) J2.7@244.361,67.241 ; 243.719,58.759 ccw(c242.78,59.698) 244.108,59.698 ccw(c245.436,59.698) 244.497,58.759 ; J2.7@243.719,66.041 cw(c242.78,65.102) 244.108,65.102 cw(c245.436,65.102) J2.7@244.497,66.041 ; J2.7@243.719,66.819 ccw(c242.78,67.758) 244.108,67.758 ccw(c245.436,67.758) J2.7@244.497,66.819 ; J2.8@243.719,68.581 cw(c242.78,67.642) 244.108,67.642 cw(c245.436,67.642) J2.8@244.497,68.581 ; J2.8@243.719,69.359 ccw(c242.78,70.298) 244.108,70.298 ccw(c245.436,70.298) J2.8@244.497,69.359 ; J2.7@243.855,67.241 ccw(c243.644,67.915) 244.326,67.733 ccw(c244.832,67.597) J2.7@244.556,67.152
  Bottom Layer w0.3: 26.54,90.12 37.16,100.74 84.728,100.74 88.759,96.709 107.555,96.709 108.571,95.693 184.644,95.693 185.329,95.007 231.278,95.007 v1(232.548,93.737) ; 26.54,90.67 ccw(c26.54,91.998) 27.479,91.059 ccw(c28.418,90.12) 27.09,90.12 ; 26.54,90.97 ccw(c26.54,93.022) 27.991,91.571 ccw(c29.442,90.12) 27.39,90.12 ; v1@232.398,93.737 ccw(c232.036,93.737) 232.292,93.993 ccw(c232.548,94.25) v1@232.548,93.887 ; 243.258,58.37 cw(c241.206,58.37) 242.657,56.919 cw(c244.108,55.468) 244.108,57.52 ; 243.558,58.37 cw(c242.23,58.37) 243.169,57.431 cw(c244.108,56.492) 244.108,57.82 ; 244.108,58.37 242.013,56.275 235.797,56.275 235.037,57.034 235.037,59.016 236.841,60.819 278.743,60.819 281.192,58.37 ; 280.342,58.37 ccw(c278.29,58.37) 279.741,59.821 ccw(c281.192,61.272) 281.192,59.22 ; 280.642,58.37 ccw(c279.314,58.37) 280.253,59.309 ccw(c281.192,60.248) 281.192,58.92
D4: "ARDUINO MICRO.26" "ARDUINO SHIELD.19" J2.9 | length 284.2
  Top Layer w0.3: v1@214.687,87.078 cw(c214.431,86.822) 214.793,86.822 cw(c215.156,86.822) v1@214.899,87.078 ; v1(214.793,87.184) 214.793,60.844 218.73,56.907 245.185,56.907 246.648,58.37 J2.9@246.648,66.43 ; 245.798,58.37 cw(c243.746,58.37) 245.197,56.919 cw(c246.648,55.468) 246.648,57.52 ; 246.047,58.971 ccw(c244.596,60.422) 246.648,60.422 ccw(c248.7,60.422) 247.249,58.971 ; J2.9@246.047,65.829 cw(c244.596,64.378) 246.648,64.378 cw(c248.7,64.378) J2.9@247.249,65.829 ; 246.098,58.37 cw(c244.77,58.37) 245.709,57.431 cw(c246.648,56.492) 246.648,57.82 ; 246.259,58.759 ccw(c245.32,59.698) 246.648,59.698 ccw(c247.976,59.698) 247.037,58.759 ; J2.9@246.259,66.041 cw(c245.32,65.102) 246.648,65.102 cw(c247.976,65.102) J2.9@247.037,66.041
  Bottom Layer w0.3: 23.399,89.519 cw(c21.948,88.068) 24,88.068 cw(c26.052,88.068) 24.601,89.519 ; 23.611,89.731 cw(c22.672,88.792) 24,88.792 cw(c25.328,88.792) 24.389,89.731 ; 24,90.12 24,87.87 24.686,87.184 v1(214.793,87.184) ; v1@214.687,87.078 ccw(c214.431,86.822) 214.431,87.184 ccw(c214.431,87.546) v1@214.687,87.29
D5: "ARDUINO MICRO.27" "ARDUINO SHIELD.20" J2.11 | length 289.3
  Top Layer w0.3: v1(186.65,83.273) 188.708,85.33 190.536,85.33 211.923,63.943 211.923,62.216 219.315,54.825 245.643,54.825 249.188,58.37 J2.11@249.188,66.43 ; v1@186.65,83.423 ccw(c186.65,83.785) 186.906,83.529 ccw(c187.162,83.273) v1@186.8,83.273 ; 248.338,58.37 cw(c246.286,58.37) 247.737,56.919 cw(c249.188,55.468) 249.188,57.52 ; 248.587,58.971 ccw(c247.136,60.422) 249.188,60.422 ccw(c251.24,60.422) 249.789,58.971 ; J2.11@248.587,65.829 cw(c247.136,64.378) 249.188,64.378 cw(c251.24,64.378) J2.11@249.789,65.829 ; 248.638,58.37 cw(c247.31,58.37) 248.249,57.431 cw(c249.188,56.492) 249.188,57.82 ; 248.799,58.759 ccw(c247.86,59.698) 249.188,59.698 ccw(c250.516,59.698) 249.577,58.759 ; J2.11@248.799,66.041 cw(c247.86,65.102) 249.188,65.102 cw(c250.516,65.102) J2.11@249.577,66.041
  Bottom Layer w0.3: 20.61,90.12 cw(c18.558,90.12) 20.009,88.669 cw(c21.46,87.218) 21.46,89.27 ; 20.91,90.12 cw(c19.582,90.12) 20.521,89.181 cw(c21.46,88.242) 21.46,89.57 ; 21.46,90.12 18.223,86.883 18.223,80.758 18.68,80.301 112.025,80.301 114.952,83.228 186.606,83.228 v1(186.65,83.273) ; 186.181,83.228 ccw(c186.181,83.742) v1@186.544,83.379
D6: "ARDUINO MICRO.28" "ARDUINO SHIELD.21" J2.13 | length 293.5
  Top Layer w0.3: v1@17.964,79.061 ccw(c17.708,79.317) 18.07,79.317 ccw(c18.433,79.317) v1@18.176,79.061 ; v1(18.07,78.955) 18.07,89.27 ; 18.153,89.753 cw(c17.77,89.57) 18.07,89.27 ; 18.553,89.353 ccw(c18.37,88.97) 18.07,89.27 ; 18.92,90.12 18.07,89.27 ; v1@188.135,80.825 cw(c188.135,80.462) 188.391,80.719 cw(c188.648,80.975) v1@188.285,80.975 ; v1(188.135,80.975) 223.76,45.35 238.708,45.35 251.728,58.37 J2.13@251.728,66.43 ; 250.878,58.37 cw(c248.826,58.37) 250.277,56.919 cw(c251.728,55.468) 251.728,57.52 ; 251.127,58.971 ccw(c249.676,60.422) 251.728,60.422 ccw(c253.78,60.422) 252.329,58.971 ; J2.13@251.127,65.829 cw(c249.676,64.378) 251.728,64.378 cw(c253.78,64.378) J2.13@252.329,65.829 ; 251.178,58.37 cw(c249.85,58.37) 250.789,57.431 cw(c251.728,56.492) 251.728,57.82 ; 251.339,58.759 ccw(c250.4,59.698) 251.728,59.698 ccw(c253.056,59.698) 252.117,58.759 ; J2.13@251.339,66.041 cw(c250.4,65.102) 251.728,65.102 cw(c253.056,65.102) J2.13@252.117,66.041
  Bottom Layer w0.3: v1(18.07,78.955) 113.397,78.955 115.417,80.975 v1(188.135,80.975) ; v1@18.176,78.849 cw(c18.433,78.592) 18.433,78.955 cw(c18.433,79.317) v1@18.176,79.061 ; v1@188.029,80.869 ccw(c187.773,80.612) 187.773,80.975 ccw(c187.773,81.337) v1@188.029,81.081